# Altium PCB carrier board Ultrafiltrasi.PcbDoc (part 2 of 4)
Units mm, origin at the board's own origin, x right, y up, seen from the top; angles counter-clockwise.
Board outline 196.34 x 220.85 mm, 2 copper layers (Top Layer, Bottom Layer); 114 components, 209 nets, 667 pads, 70 vias.
Unrouted connection lines stored in the file: 5.
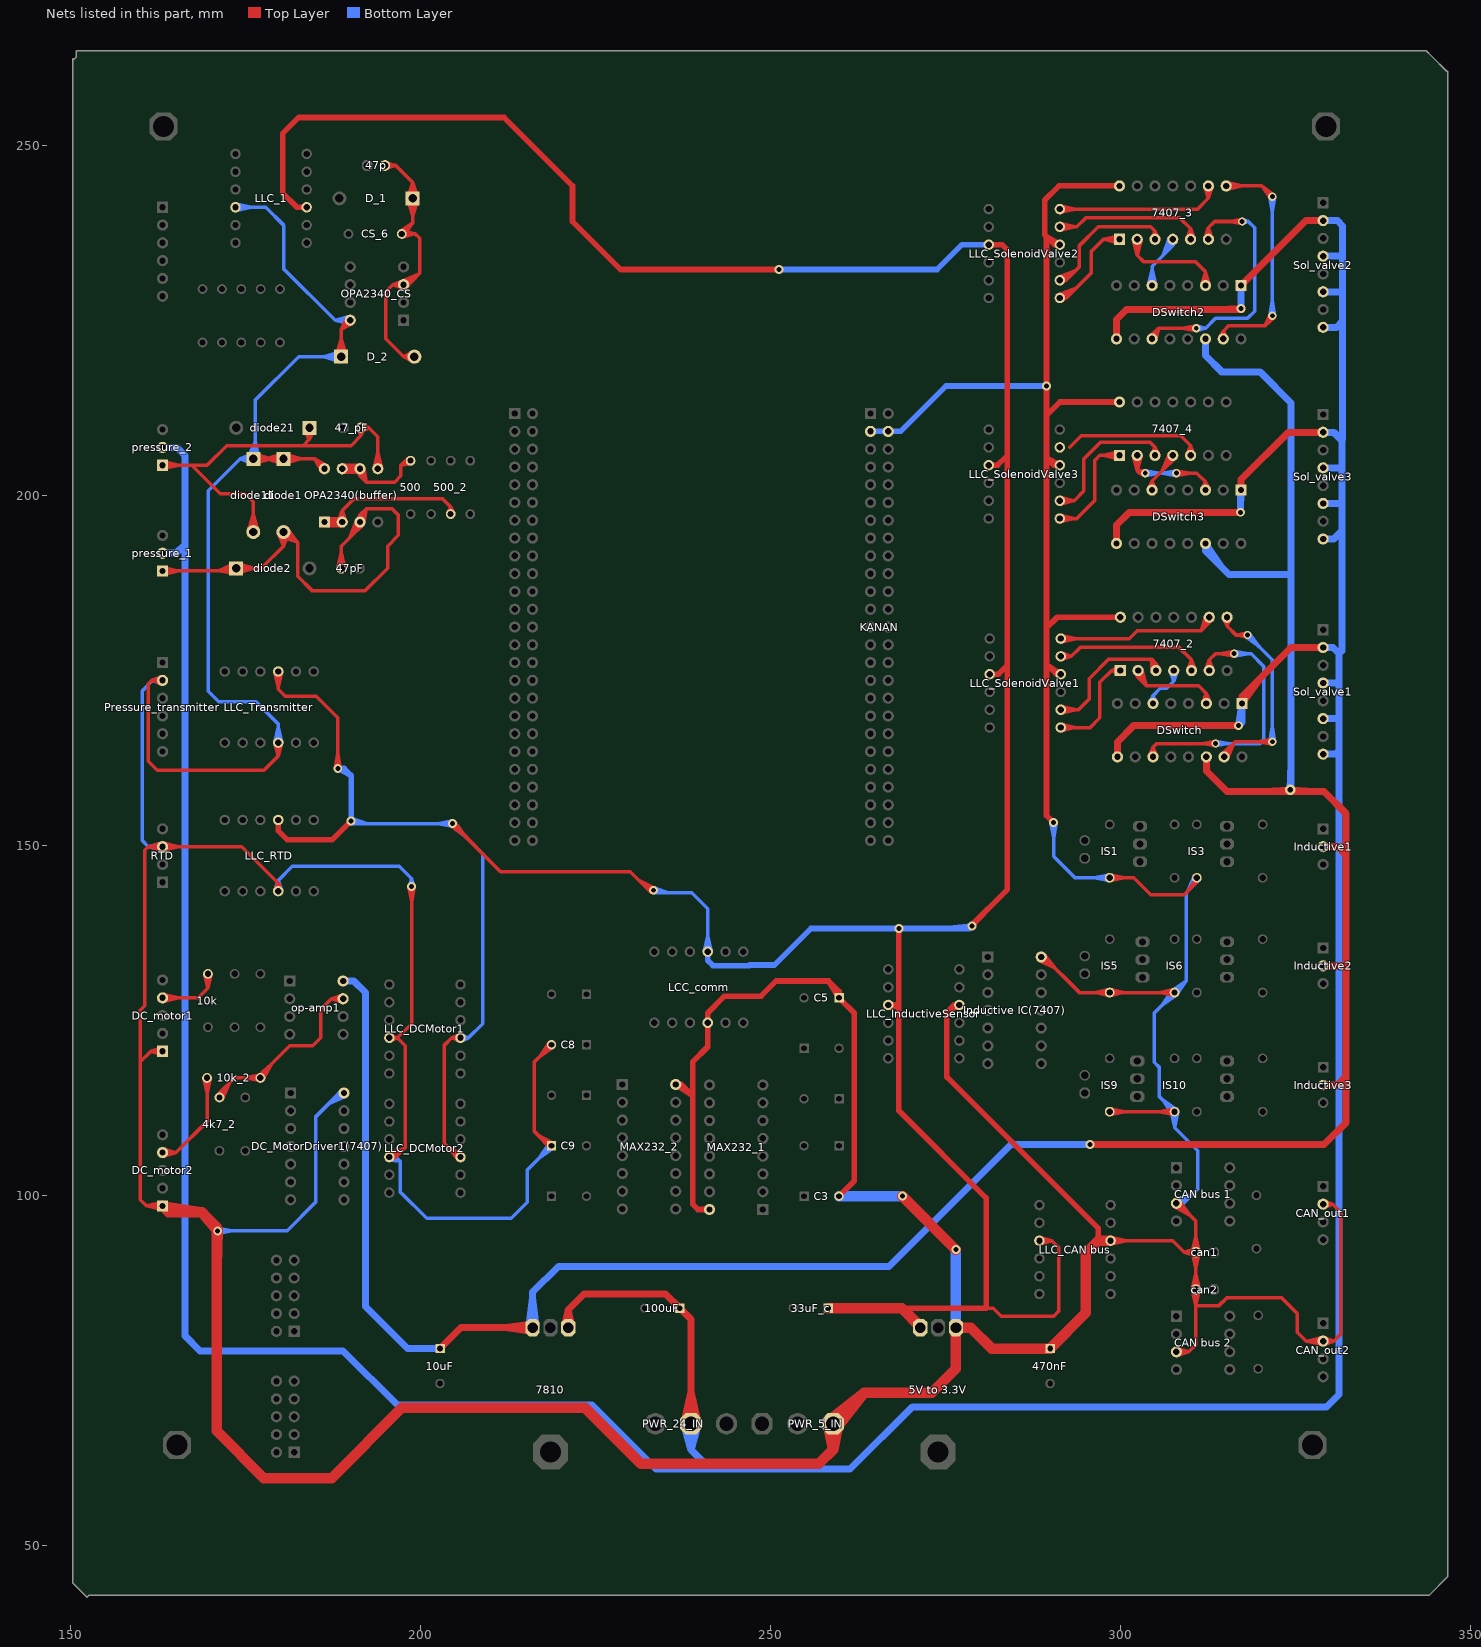
[diagram p2: the nets of this part, all layers, seen from the top]

## Via types
v1: diameter 1.2, hole 0.711, Top Layer to Bottom Layer, 26 vias
v2: diameter 1.27, hole 0.711, Top Layer to Bottom Layer, 24 vias
v3: diameter 1.2, hole 0.7, Top Layer to Bottom Layer, 19 vias
v4: diameter 1.5, hole 0.8, Top Layer to Bottom Layer, 1 vias

## Nets (pads, with @x,y where several pads share a name; then routed paths per layer and width w, separated by ;. In a path a pad name is that pad's centre, name@x,y a point inside that pad or via, vN(x,y) a via of type N, cw(c..) or ccw(c..) an arc to the next point about the centre after c; other vN are vias at no path point) (continued)
Net4k7_2_2: 4k7_2.2 10k_2.1 op-amp1.7 | length 50.9
  Top Layer w0.5: 4k7_2.2@170.978,114.335 172.769,116.127 ; 4k7_2.2@171.714,113.823 172.769,116.127 ; 10k_2.1@176.841,117.152 178.732,118.788 ; 10k_2.1@177.119,116.392 174.965,116.84 10k_2.1@177.119,117.288 ; 10k_2.1@177.54,116.591 178.732,118.788 ; op-amp1.7@188.884,127.601 187.325,128.143 ; op-amp1.7@188.884,128.685 187.325,128.143 ; 172.769,116.127 4k7_2.2@171.323,114.046 171.323,114.681 173.482,116.84 10k_2.1@177.165,116.84 ; 10k_2.1@177.165,116.84 178.732,118.788 ; 10k_2.1@177.165,116.84 177.165,117.221 181.356,121.412 184.658,121.412 185.801,122.555 185.801,126.619 187.325,128.143 ; 187.325,128.143 op-amp1.7@188.976,128.143 187.325,128.143
"Net5V to 3.3V_1": 470nF.1 7407_2.14 7407_3.14 7407_4.14 "5V to 3.3V.1" "CAN bus 1.3" "CAN bus 2.3" "Inductive IC(7407).14" "LLC_CAN bus.P$10" C3.2 C5.1 C8.2 C9.1 can1.2 can2.2 CAN_out1.2 CAN_out2.2 D_2.2 DC_motor1.1 DC_motor2.1 DC_MotorDriver1(7407).14 diode1.2 diode11.2 IS1.1 IS3.1 IS5.1 IS6.1 IS9.1 IS10.1 KANAN.3 KANAN.4 LCC_comm.P$10 LLC_1.P$10 LLC_DCMotor1.P$10 LLC_DCMotor2.P$10 LLC_InductiveSensor.P$10 LLC_RTD.P$10 LLC_SolenoidValve1.P$10 LLC_SolenoidValve2.P$10 LLC_SolenoidValve3.P$10 LLC_Transmitter.P$10 MAX232_1.16 MAX232_2.16 OPA2340(buffer).8 OPA2340_CS.8 Pressure_transmitter.2 PWR_5_IN.1 RTD.3 | length 1543.5
  Top Layer w0.5: Pressure_transmitter.2@163.096,173.068 161.671,173.609 ; Pressure_transmitter.2@163.096,174.15 161.671,173.609 ; DC_motor1.1@163.101,121.192 161.534,120.64 ; DC_motor1.1@163.107,120.107 161.534,120.64 ; RTD.3@163.121,149.315 161.163,149.86 ; RTD.3@163.121,150.405 161.163,149.86 ; DC_motor2.1@163.129,98.006 160.909,98.552 ; DC_motor2.1@163.129,99.098 160.909,98.552 ; DC_motor2.1@163.195,98.552 160.909,98.552 ; DC_motor1.1@163.195,120.64 161.534,120.64 ; DC_motor1.1@163.195,120.65 161.534,120.64 ; Pressure_transmitter.2@163.195,173.609 161.671,173.609 ; RTD.3@163.261,149.314 165.495,149.86 RTD.3@163.261,150.406 ; diode11.2@176.149,205.255 diode1.2@180.467,205.255 184.889,205.255 ; diode11.2@176.161,205.005 178.649,205.255 ; diode11.2@176.161,205.505 178.649,205.255 ; diode11.2@176.262,204.513 178.649,205.255 ; diode11.2@176.262,205.997 178.649,205.255 ; LLC_Transmitter.P$10@179.209,164.653 179.705,162.814 ; LLC_RTD.P$10@179.217,143.619 179.705,144.653 ; LLC_RTD.P$10@179.705,143.51 179.705,144.653 ; LLC_Transmitter.P$10@179.705,164.719 179.705,162.814 ; LLC_RTD.P$10@180.193,143.619 179.705,144.653 ; LLC_Transmitter.P$10@180.201,164.653 179.705,162.814 ; diode1.2@180.354,204.513 177.967,205.255 ; diode1.2@180.354,205.997 177.967,205.255 ; diode1.2@180.455,205.005 177.967,205.255 ; diode1.2@180.455,205.505 177.967,205.255 ; diode1.2@180.479,205.005 182.967,205.255 ; diode1.2@180.479,205.505 182.967,205.255 ; diode1.2@180.58,204.513 182.967,205.255 ; diode1.2@180.58,205.997 182.967,205.255 ; 185.87,203.503 184.889,205.255 ; 186.309,203.835 184.889,205.255 ; 186.641,204.274 184.889,205.255 ; D_2.2@187.957,219.95 188.699,222.337 ; D_2.2@188.449,219.849 188.699,222.337 ; D_2.2@188.699,219.837 188.699,223.751 ; D_2.2@188.949,219.849 188.699,222.337 ; D_2.2@189.441,219.95 188.699,222.337 ; OPA2340_CS.8@189.549,225.37 188.699,223.751 ; OPA2340_CS.8@189.992,225.044 188.699,223.751 ; OPA2340_CS.8@190.318,224.601 188.699,223.751 ; LLC_DCMotor2.P$10@195.369,105.99 197.759,106.827 ; LLC_DCMotor1.P$10@195.58,122.555 196.723,122.555 ; LLC_DCMotor1.P$10@195.689,122.067 196.723,122.555 ; LLC_DCMotor1.P$10@195.689,123.043 196.723,122.555 ; LLC_DCMotor2.P$10@195.876,105.134 197.759,106.827 ; v2@198.372,144.11 198.755,142.01 v2@199.138,144.11 ; v2(198.755,144.145) 198.755,124.587 196.723,122.555 ; C8.2@218.409,121.844 216.998,119.835 C8.2@219.007,121.245 ; C9.1@218.441,106.848 216.835,108.666 ; C8.2@218.734,121.571 216.309,119.146 216.309,109.192 218.345,107.156 C9.1@218.734,107.156 216.835,108.666 ; C9.1@218.968,107.511 216.835,108.666 ; 288.37,133.652 290.717,132.447 ; 289.061,134.5 290.717,132.447 ; IS5.1@298.404,128.584 296.25,129.032 IS5.1@298.404,129.48 ; IS9.1@298.45,112.014 IS10.1@307.721,112.014 ; IS1.1@298.45,145.415 301.879,145.415 304.292,143.002 309.118,143.002 310.896,144.78 IS3.1@310.896,145.415 309.468,143.352 IS3.1@311.242,145.127 ; IS9.1@298.496,111.566 300.65,112.014 IS9.1@298.496,112.462 ; IS5.1@298.496,128.584 300.65,129.032 IS5.1@298.496,129.48 ; IS1.1@298.496,144.967 300.65,145.415 IS1.1@298.496,145.863 ; 298.577,93.599 307.467,93.599 309.118,91.948 ; 298.633,93.102 300.827,93.599 298.633,94.096 ; 307.66,98.482 309.933,97.229 ; IS10.1@307.675,111.566 305.521,112.014 IS10.1@307.675,112.462 ; IS6.1@307.675,128.584 305.521,129.032 IS6.1@307.675,129.48 ; IS6.1@307.721,129.032 IS5.1@298.45,129.032 294.132,129.032 289.052,134.112 288.671,134.112 290.717,132.447 ; 307.975,77.724 309.753,77.724 ; 308.06,77.181 309.753,77.724 ; 308.06,78.267 309.753,77.724 ; 308.378,99.307 309.933,97.229 ; can2.2@310.26,86.556 310.769,84.352 can2.2@311.278,86.556 ; can2.2@310.26,86.672 310.769,88.876 can2.2@311.278,86.672 ; can1.2@310.26,91.89 310.769,89.686 can1.2@311.278,91.89 ; can1.2@310.26,92.006 310.769,94.21 can1.2@311.278,92.006 ; can1.2@310.69,91.442 309.118,91.948 ; can1.2@310.69,92.454 309.118,91.948 ; CAN_out2.2@328.864,78.702 326.63,79.248 CAN_out2.2@328.864,79.794 ; CAN_out1.2@328.93,98.806 330.327,98.806 ; CAN_out2.2@329.029,78.707 330.454,79.248 ; CAN_out2.2@329.029,79.789 330.454,79.248 ; CAN_out1.2@329.038,98.267 330.327,98.806 ; CAN_out1.2@329.038,99.345 330.327,98.806 ; 160.02,119.126 160.02,126.512 160.645,127.137 160.645,149.342 161.163,149.86 ; 160.02,119.126 160.02,99.441 160.909,98.552 ; 160.02,119.126 161.534,120.64 ; 161.163,149.86 RTD.3@163.195,149.86 174.498,149.86 179.705,144.653 ; 161.671,173.609 161.163,173.101 161.163,162.052 162.433,160.782 177.673,160.782 179.705,162.814 ; LLC_DCMotor2.P$10@195.58,105.537 196.469,105.537 ; LLC_DCMotor2.P$10@195.58,105.537 197.759,106.827 ; LLC_DCMotor2.P$10@195.58,105.537 196.469,105.537 ; 196.469,105.537 195.721,105.057 196.469,105.537 ; 196.469,105.537 195.721,106.017 196.469,105.537 ; 196.469,105.537 197.866,106.934 197.866,121.412 196.723,122.555 ; 309.118,91.948 can1.2@310.769,91.948 ; 309.753,77.724 310.769,78.74 310.769,84.328 ; 309.933,97.229 307.975,98.933 308.229,98.933 310.769,96.393 can1.2@310.769,91.948 ; 310.769,84.328 314.071,84.328 315.214,85.471 322.961,85.471 325.247,83.185 325.247,80.518 326.517,79.248 CAN_out2.2@328.93,79.248 330.454,79.248 ; 310.769,84.328 can2.2@310.769,86.614 can1.2@310.769,91.948 ; 330.327,98.806 331.47,97.663 331.47,80.264 330.454,79.248
  Top Layer w0.8: 241.046,121.564 LCC_comm.P$10@241.046,124.714 ; C3.2@259.802,99.949 262.001,102.148 262.001,126.071 C5.1@259.802,128.27 ; v2(290.449,153.289) 289.433,154.305 289.433,175.895 ; LLC_SolenoidValve1.P$10@290.83,174.498 289.433,175.895 ; LLC_SolenoidValve1.P$10@291.465,174.498 289.433,175.895 ; 296.799,93.599 296.799,95.377 275.209,116.967 275.209,126.238 ; 7407_4.14@299.847,213.36 291.338,213.36 289.433,211.455 ; 7407_3.14@299.847,244.221 291.211,244.221 289.179,242.189 289.179,237.236 289.433,236.982 ; 7407_2.14@299.974,182.626 290.957,182.626 289.433,181.102 ; MAX232_2.16@236.474,115.892 237.295,115.892 ; MAX232_2.16@236.474,115.892 238.887,114.3 ; MAX232_2.16@236.474,115.892 237.295,115.892 ; 237.295,115.892 238.887,114.3 ; 238.887,114.3 238.887,98.806 239.649,98.044 ; 238.887,114.3 238.887,119.126 241.046,121.285 LCC_comm.P$10@241.046,124.714 ; 239.649,98.044 MAX232_1.16@241.3,98.044 239.649,98.044 ; LCC_comm.P$10@241.046,124.714 241.046,126.111 243.459,128.524 248.666,128.524 250.825,130.683 258.318,130.683 ; 258.318,130.683 C5.1@259.802,128.27 ; 258.318,130.683 259.802,129.199 ; C5.1@259.802,128.27 259.802,129.199 ; C5.1@259.802,128.27 259.802,129.199 ; 275.209,126.238 LLC_InductiveSensor.P$10@276.987,127.254 ; 275.209,126.238 276.225,127.254 ; 276.225,127.254 LLC_InductiveSensor.P$10@276.987,127.254 ; 276.225,127.254 LLC_InductiveSensor.P$10@276.987,127.254 ; 289.433,175.895 289.433,181.102 ; 289.433,181.102 289.433,205.359 ; 289.433,205.359 LLC_SolenoidValve3.P$10@291.338,204.343 ; 289.433,205.359 290.449,204.343 ; 289.433,205.359 289.433,211.455 ; 289.433,211.455 289.433,236.982 ; 289.433,236.982 LLC_SolenoidValve2.P$10@291.338,235.839 ; 289.433,236.982 290.576,235.839 ; 290.449,204.343 LLC_SolenoidValve3.P$10@291.338,204.343 ; 290.449,204.343 LLC_SolenoidValve3.P$10@291.338,204.343 ; 290.576,235.839 LLC_SolenoidValve2.P$10@291.338,235.839 ; 290.576,235.839 LLC_SolenoidValve2.P$10@291.338,235.839
  Top Layer w1.5: 170.942,89.854 v2(171.069,94.996) 168.783,97.663 ; PWR_5_IN.1@258.196,67.368 258.966,63.767 ; PWR_5_IN.1@258.453,68.03 263.398,71.882 ; PWR_5_IN.1@259.546,66.937 263.398,71.882 ; PWR_5_IN.1@259.735,67.368 258.966,63.767 ; v2(268.859,99.949) v2(276.492,92.316) ; 276.492,75.396 276.492,80.912 ; 298.577,93.599 296.799,93.599 295.021,91.821 295.021,83.272 470nF.1@289.941,78.192 281.599,78.192 278.625,81.166 276.492,81.166 276.492,75.324 273.05,71.882 263.398,71.882 ; DC_motor2.1@163.195,98.552 164.084,97.663 ; DC_motor2.1@163.195,98.552 168.783,97.663 ; DC_motor2.1@163.195,98.552 164.084,97.663 ; 164.084,97.663 168.783,97.663 ; 168.783,97.663 170.942,95.504 170.942,66.421 177.673,59.69 187.325,59.69 197.358,69.723 223.52,69.723 231.521,61.722 256.921,61.722 258.966,63.767 ; 258.966,63.767 PWR_5_IN.1@258.966,67.45 263.398,71.882
  Bottom Layer w0.5: Pressure_transmitter.2@163.087,173.07 161.798,173.609 ; Pressure_transmitter.2@163.087,174.148 161.798,173.609 ; RTD.3@163.121,149.315 161.163,149.86 ; RTD.3@163.121,150.405 161.163,149.86 ; RTD.3@163.195,149.86 161.163,149.86 ; Pressure_transmitter.2@163.195,173.609 161.798,173.609 ; v2@170.688,94.996 180.975,94.996 185.039,99.06 185.039,111.259 188.171,114.391 ; v2(171.069,94.996) 173.204,94.996 ; v2@171.104,94.613 173.204,94.996 ; v2@171.104,95.379 173.204,94.996 ; LLC_1.P$10@173.609,241.173 177.927,241.173 180.467,238.633 180.467,232.41 187.833,225.044 ; LLC_1.P$10@173.665,240.676 175.859,241.173 LLC_1.P$10@173.665,241.67 ; diode11.2@175.426,205.454 176.463,207.809 ; diode11.2@175.903,205.298 176.463,207.809 ; diode11.2@176,204.52 174.267,205.255 ; diode11.2@176,205.99 174.267,205.255 ; diode11.2@176.132,205.006 174.267,205.255 ; diode11.2@176.132,205.504 174.267,205.255 ; diode11.2@176.398,205.237 176.463,207.809 ; diode11.2@176.899,205.273 176.463,207.809 ; LLC_Transmitter.P$10@179.208,164.775 179.705,166.969 LLC_Transmitter.P$10@180.202,164.775 ; LLC_RTD.P$10@179.212,143.592 179.705,145.034 ; LLC_RTD.P$10@179.705,143.51 179.705,145.034 ; LLC_Transmitter.P$10@179.705,164.719 179.705,167.386 176.53,170.561 171.196,170.561 169.725,172.032 169.725,200.713 174.267,205.255 ; LLC_RTD.P$10@180.198,143.592 179.705,145.034 ; D_2.2@188.586,219.095 186.199,219.837 ; D_2.2@188.586,220.579 186.199,219.837 ; D_2.2@188.686,219.587 186.199,219.837 ; D_2.2@188.686,220.087 186.199,219.837 ; D_2.2@188.699,219.837 182.626,219.837 176.463,213.674 176.463,205.569 diode11.2@176.149,205.255 ; 188.742,115.096 186.941,113.161 ; 189.371,114.201 186.941,113.161 ; OPA2340_CS.8@189.922,224.498 187.833,225.044 ; OPA2340_CS.8@189.922,225.59 187.833,225.044 ; OPA2340_CS.8@189.992,225.044 187.833,225.044 ; LLC_DCMotor2.P$10@195.46,105.052 197.104,104.902 ; LLC_DCMotor2.P$10@195.84,105.964 197.104,104.902 ; v2@198.375,144.21 198.755,145.288 ; v2(198.755,144.145) 198.755,145.288 ; v2@199.135,144.21 198.755,145.288 ; C9.1@218.409,107.43 216.998,105.421 C9.1@219.007,106.831 ; C9.1@218.734,107.156 215.265,103.687 215.265,99.06 212.979,96.774 200.914,96.774 197.104,100.584 197.104,104.902 ; v2@290.066,153.254 290.449,151.154 v2@290.832,153.254 ; v2(290.449,153.289) 290.449,148.463 293.497,145.415 IS1.1@298.45,145.415 ; IS1.1@298.404,144.967 296.25,145.415 IS1.1@298.404,145.863 ; IS10.1@307.273,111.968 307.721,109.814 IS10.1@308.169,111.968 ; IS10.1@307.375,111.726 305.96,113.775 IS10.1@308.009,112.36 ; IS6.1@307.375,129.32 305.96,127.271 IS6.1@308.009,128.686 ; IS6.1@307.435,129.379 309.372,130.683 ; 307.755,99.437 310.308,100.25 ; IS6.1@308.068,128.746 309.372,130.683 ; 308.293,98.484 310.308,100.25 ; IS3.1@310.504,145.636 309.483,143.367 ; IS3.1@311.242,145.127 309.483,143.367 ; 161.163,149.86 160.274,150.749 160.274,172.085 161.798,173.609 ; 174.267,205.255 diode11.2@176.149,205.255 ; diode11.2@176.149,205.255 176.463,207.809 ; 179.705,145.034 181.737,147.066 196.977,147.066 198.755,145.288 ; 186.941,113.161 189.103,114.681 ; 188.171,114.391 189.103,114.681 ; 188.171,114.391 188.798,115.139 188.171,114.391 ; 188.171,114.391 189.112,114.131 188.171,114.391 ; 188.171,114.391 189.103,114.681 ; 188.171,114.391 188.813,114.391 189.103,114.681 ; LLC_DCMotor2.P$10@195.58,105.537 196.469,105.537 ; LLC_DCMotor2.P$10@195.58,105.537 197.104,104.902 ; LLC_DCMotor2.P$10@195.58,105.537 196.469,105.537 ; 196.469,105.537 195.721,105.057 196.469,105.537 ; 196.469,105.537 195.721,106.017 196.469,105.537 ; 196.469,105.537 197.104,104.902 ; 307.975,98.933 308.991,98.933 ; 307.975,98.933 310.308,100.25 ; 307.975,98.933 308.991,98.933 ; 308.991,98.933 308.124,98.404 308.991,98.933 ; 308.991,98.933 308.124,99.462 308.991,98.933 ; 308.991,98.933 311.023,100.965 311.023,106.426 307.721,109.728 IS10.1@307.721,112.014 305.562,114.173 305.562,118.328 304.8,119.09 304.8,126.111 IS6.1@307.721,129.032 309.372,130.683 ; 309.372,130.683 309.372,143.256 310.896,144.78 IS3.1@310.896,145.415 309.483,143.367
  Bottom Layer w0.8: KANAN.3@264.287,209.169 KANAN.4@266.827,209.169 268.605,209.169 275.082,215.646 v2(289.433,215.646)
  Bottom Layer w1.5: C3.2@259.802,99.949 v2(268.859,99.949) 263.724,99.949 ; 276.492,81.166 v2(276.492,92.316) 276.492,87.181 ; 276.492,81.42 276.492,86.936
"Net5V to 3.3V_3": 33uF_c.1 "5V to 3.3V.3" "LLC_CAN bus.P$3" LCC_comm.P$3 LLC_1.P$3 LLC_DCMotor1.P$3 LLC_DCMotor2.P$3 LLC_InductiveSensor.P$3 LLC_RTD.P$3 LLC_SolenoidValve1.P$3 LLC_SolenoidValve2.P$3 LLC_SolenoidValve3.P$3 LLC_Transmitter.P$3 | length 630.4
  Top Layer w0.5: LLC_Transmitter.P$3@179.208,174.823 179.705,172.629 LLC_Transmitter.P$3@180.202,174.823 ; LLC_Transmitter.P$3@179.705,174.879 179.705,172.339 180.697,171.347 185.142,171.347 188.214,168.275 v2(188.214,161.036) ; v2@187.831,161.071 188.214,163.171 v2@188.597,161.071 ; v2@204.347,152.869 206.293,151.466 v2@204.89,153.412 ; v2(204.597,153.162) 211.455,146.304 229.997,146.304 v2@232.981,143.32 ; LLC_DCMotor2.P$3@205.389,105.181 203.785,107.111 ; LLC_DCMotor1.P$3@205.642,122.065 204.47,122.555 ; LLC_DCMotor1.P$3@205.642,123.045 204.47,122.555 ; LLC_DCMotor1.P$3@205.74,122.555 204.47,122.555 ; LLC_DCMotor2.P$3@206.013,105.956 203.785,107.111 ; v2@233.057,143.337 231.292,145.009 ; v2(233.299,143.637) 231.292,145.009 ; v2@233.49,143.971 231.292,145.009 ; 280.797,83.947 281.813,83.947 282.956,82.804 290.449,82.804 291.211,83.566 291.211,92.583 290.195,93.599 ; 288.417,93.599 290.195,93.599 ; 288.487,93.104 290.195,93.599 ; 288.487,94.094 290.195,93.599 ; 203.785,107.111 LLC_DCMotor2.P$3@205.74,105.537 205.359,105.537 203.454,107.442 203.454,121.539 204.47,122.555
  Top Layer w0.8: LLC_RTD.P$3@179.705,153.67 179.705,152.146 180.975,150.876 187.452,150.876 v2(190.119,153.543) ; LLC_1.P$3@183.769,241.173 182.372,241.173 180.34,243.205 180.34,251.714 182.626,254 211.963,254 221.742,244.221 221.742,239.141 228.6,232.283 v2(251.206,232.283) 248.171,232.283 ; v2(268.351,138.176) 268.351,126.873 ; 268.732,83.947 280.797,83.947 280.797,99.695 268.351,112.141 268.351,126.873 ; v2@278.511,138.43 283.845,143.764 283.845,175.768 ; v2(278.765,138.557) 281.028,140.947 ; LLC_SolenoidValve3.P$3@281.178,204.343 282.448,204.343 283.845,205.74 ; LLC_SolenoidValve2.P$3@281.178,235.839 283.083,235.839 283.845,235.077 283.845,205.74 ; LLC_SolenoidValve1.P$3@281.305,174.498 282.575,174.498 283.845,175.768 ; LLC_InductiveSensor.P$3@266.827,127.254 267.97,127.254 ; LLC_InductiveSensor.P$3@266.827,127.254 268.351,126.873 ; LLC_InductiveSensor.P$3@266.827,127.254 267.97,127.254 ; 267.97,127.254 268.351,126.873 ; 283.845,175.768 283.845,205.74
  Top Layer w1.5: 33uF_c.1@258.278,83.947 268.732,83.947 ; 271.412,81.166 271.412,81.267 268.732,83.947 ; 271.412,81.42 268.732,83.947
  Bottom Layer w0.5: v2@190.088,153.159 192.444,153.162 ; v2@190.212,153.917 192.444,153.162 ; v2@204.347,152.869 206.293,151.466 v2@204.89,153.412 ; v2@204.562,152.779 202.462,153.162 v2@204.562,153.545 ; LLC_DCMotor1.P$3@205.74,122.555 206.883,122.555 ; LLC_DCMotor1.P$3@205.849,122.067 206.883,122.555 ; LLC_DCMotor1.P$3@205.849,123.043 206.883,122.555 ; v2@233.267,143.253 235.518,143.256 ; v2@233.299,143.256 238.76,143.256 241.046,140.97 LCC_comm.P$3@241.046,134.874 ; v2(233.299,143.637) 235.518,143.256 ; v2@233.396,144.009 235.518,143.256 ; LCC_comm.P$3@240.549,134.93 241.046,137.124 LCC_comm.P$3@241.543,134.93 ; 192.444,153.162 v2(190.119,153.543) 190.5,153.162 v2(204.597,153.162) 208.915,148.844 208.915,124.587 206.883,122.555
  Bottom Layer w0.8: v2(190.119,153.543) 190.119,160.02 ; LCC_comm.P$3@241.046,134.874 241.046,133.604 241.786,132.864 246.958,132.864 247.063,132.969 250.571,132.969 255.778,138.176 v2(268.351,138.176) 278.384,138.176 v2(278.765,138.557) 275.545,138.176 ; v2(251.206,232.283) 273.812,232.283 277.368,235.839 LLC_SolenoidValve2.P$3@281.178,235.839 ; v2(188.214,161.036) 189.103,161.036 ; v2(188.214,161.036) 190.119,160.02 ; v2(188.214,161.036) 189.103,161.036 ; 189.103,161.036 190.119,160.02
Net10k_2: 10k.2 DC_motor1.4 | length 19.8
  Top Layer w0.5: DC_motor1.4@163.195,128.27 168.275,128.27 169.672,129.667 ; DC_motor1.4@163.261,127.724 165.495,128.27 DC_motor1.4@163.261,128.816 ; 10k.2@169.225,131.649 169.672,129.667 ; 10k.2@170.119,131.649 169.672,129.667 ; 169.672,129.667 10k.2@169.672,131.699 169.672,129.667
Net10k_2_2: 10k_2.2 DC_motor2.4 | length 22.6
  Top Layer w0.5: DC_motor2.4@163.195,106.172 165.1,106.172 ; DC_motor2.4@163.274,105.628 165.1,106.172 ; DC_motor2.4@163.274,106.716 165.1,106.172 ; 10k_2.2@169.097,116.794 169.545,114.64 10k_2.2@169.993,116.794 ; 10k_2.2@169.545,116.84 169.545,110.617 165.1,106.172
Net10uF_1: 10uF.1 7810.3 DSwitch2.14 DSwitch3.14 DSwitch.14 Inductive1.2 Inductive2.2 Inductive3.2 op-amp1.8 | length 413.6
  Top Layer w1: 10uF.1@202.819,78.192 205.793,81.166 7810.3@216.04,81.166 ; 7810.3@216.007,80.651 212.024,81.166 7810.3@216.007,81.681 ; v2(295.656,107.315) 329.057,107.315 332.232,110.49 332.232,117.094 ; DSwitch.14@312.254,162.687 312.254,160.694 315.214,157.734 329.057,157.734 332.232,154.559 332.232,148.59 ; 320.446,157.734 v4(324.231,157.988) 328.011,157.734 ; Inductive3.2@328.93,115.824 330.962,115.824 332.232,117.094 ; Inductive2.2@328.93,132.842 332.105,132.842 ; Inductive1.2@328.93,149.86 330.962,149.86 332.232,148.59 ; 332.232,117.094 332.232,148.59
  Bottom Layer w1: op-amp1.8@188.976,130.683 190.5,130.683 192.151,129.032 192.151,84.201 198.16,78.192 10uF.1@202.819,78.192 ; 7810.3@215.525,81.453 216.04,85.436 ; 7810.3@216.04,81.166 216.04,86.246 219.71,89.916 266.954,89.916 284.353,107.315 v2(295.656,107.315) ; 7810.3@216.04,81.42 216.04,85.436 ; 7810.3@216.555,81.453 216.04,85.436 ; 314.53,189.66 DSwitch3.14@312.127,193.167 ; v4(324.231,157.988) 324.358,161.75 ; v4@324.231,158.242 324.358,158.115 324.358,188.722 ; 312.127,192.063 DSwitch3.14@312.127,193.167 ; 312.127,192.063 315.468,188.722 324.358,188.722 ; 312.127,192.063 DSwitch3.14@312.127,193.167 ; 312.127,220.003 DSwitch2.14@312.127,222.377 312.127,220.003 ; 312.127,220.003 314.452,217.678 319.913,217.678 324.358,213.233 324.358,188.722
Net47_pF_2: 47_pF.2 diode11.1 diode21.2 OPA2340(buffer).5 pressure_2.1 | length 98.8
  Top Layer w0.5: pressure_2.1@163.195,204.343 167.386,204.343 ; pressure_2.1@163.261,203.797 165.495,204.343 pressure_2.1@163.261,204.889 ; diode11.1@175.407,194.907 176.149,197.295 ; diode11.1@175.899,194.807 176.149,197.295 ; diode11.1@176.149,194.795 176.149,199.136 175.006,200.279 171.45,200.279 167.386,204.343 ; diode11.1@176.399,194.807 176.149,197.295 ; diode11.1@176.891,194.907 176.149,197.295 ; 47_pF.2@191.017,209.562 191.516,208.534 ; 47_pF.2@191.631,209.178 192.659,209.677 ; 47_pF.2@191.631,210.176 192.659,209.677 ; 47_pF.2@192.015,209.562 191.516,208.534 ; 193.383,203.901 193.929,206.135 194.475,203.901 ; 193.929,203.835 193.929,208.407 192.659,209.677 ; 167.386,204.343 169.545,204.343 172.339,207.137 183.261,207.137 ; 183.261,207.137 190.119,207.137 191.516,208.534 ; 183.261,207.137 184.15,208.026 ; 184.15,208.026 diode21.2@184.173,209.677 184.15,208.026 ; 184.15,208.026 183.923,209.662 184.15,208.026 ; 184.15,208.026 184.422,209.655 184.15,208.026 ; 184.15,208.026 183.44,209.517 184.15,208.026 ; 184.15,208.026 184.901,209.497 184.15,208.026 ; 184.15,208.026 184.15,209.677 184.15,208.026 ; 191.516,208.534 47_pF.2@191.516,209.677 192.659,209.677
Net47p_2: 47p.2 CS_6.2 D_1.2 D_2.1 OPA2340_CS.3 | length 85.8
  Top Layer w0.5: 47p.2@194.945,247.142 196.469,247.142 ; 47p.2@195.031,246.637 196.469,247.142 ; 47p.2@195.031,247.647 196.469,247.142 ; CS_6.2@197.074,237.712 198.905,238.91 ; OPA2340_CS.3@197.346,230.605 199.733,231.61 ; CS_6.2@197.411,236.916 199.263,237.363 ; CS_6.2@197.411,237.81 199.263,237.363 ; OPA2340_CS.3@197.513,229.583 196.088,230.124 ; OPA2340_CS.3@197.513,230.665 196.088,230.124 ; CS_6.2@197.707,237.079 198.905,238.91 ; OPA2340_CS.3@197.974,229.71 199.733,231.61 ; D_1.2@198.163,242.33 198.905,239.943 ; D_1.2@198.165,242.567 198.905,244.706 ; D_1.2@198.655,242.431 198.905,239.943 ; D_1.2@198.655,242.457 198.905,244.706 ; D_2.1@198.977,219.109 197.612,219.837 ; D_2.1@198.977,220.565 197.612,219.837 ; D_2.1@199.139,219.588 197.612,219.837 ; D_2.1@199.139,220.086 197.612,219.837 ; D_1.2@199.155,242.431 198.905,239.943 ; D_1.2@199.155,242.457 198.905,244.706 ; D_2.1@199.159,219.837 197.612,219.837 ; D_1.2@199.645,242.567 198.905,244.706 ; D_1.2@199.647,242.33 198.905,239.943 ; 196.088,230.124 OPA2340_CS.3@197.612,230.124 ; 196.088,230.124 195.072,229.108 195.072,222.377 197.612,219.837 ; 196.469,247.142 198.905,244.706 ; OPA2340_CS.3@197.612,230.124 199.733,231.61 ; OPA2340_CS.3@197.612,230.124 198.247,230.124 199.898,231.775 199.898,236.728 199.263,237.363 ; 198.905,238.91 D_1.2@198.905,242.443 198.905,244.706 ; 198.905,238.91 CS_6.2@197.358,237.363 199.263,237.363
Net47pF_2: 47pF.2 diode1.1 diode2.2 OPA2340(buffer).3 pressure_1.1 | length 138.8
  Top Layer w0.5: pressure_1.1@163.195,189.23 173.332,189.23 diode2.2@173.713,189.611 ; pressure_1.1@163.261,188.684 165.495,189.23 pressure_1.1@163.261,189.776 ; diode2.2@173.499,190.33 171.123,189.23 ; diode2.2@173.665,189.856 171.123,189.23 ; diode2.2@173.715,188.861 171.123,189.23 ; diode2.2@173.725,189.361 176.213,189.611 ; diode2.2@173.725,189.861 176.213,189.611 ; diode2.2@173.738,189.362 171.123,189.23 ; diode2.2@173.825,188.869 176.213,189.611 ; diode2.2@173.825,190.353 176.213,189.611 ; diode1.1@179.73,194.655 180.467,192.786 ; diode1.1@180.116,194.132 182.499,193.294 ; diode1.1@180.217,194.779 180.467,192.786 ; diode1.1@180.329,194.587 182.499,193.294 ; diode1.1@180.625,194.988 182.499,193.294 ; diode1.1@180.717,194.779 180.467,192.786 ; diode1.1@180.997,195.325 182.499,193.294 ; diode1.1@181.204,194.655 180.467,192.786 ; 47pF.2@188.213,189.669 188.722,191.873 47pF.2@189.231,189.669 ; 47pF.2@188.722,189.611 188.722,192.786 191.389,195.453 191.389,196.215 ; 190.902,196.471 189.888,193.952 ; 190.925,196.511 192.278,198.12 ; 191.814,195.866 189.888,193.952 ; 191.914,196.05 192.278,198.12 ; 171.123,189.23 diode2.2@173.713,189.611 ; diode2.2@173.713,189.611 177.292,189.611 180.467,192.786 ; 180.467,192.786 diode1.1@180.467,194.795 ; diode1.1@180.467,194.795 182.499,193.294 ; diode1.1@180.467,194.795 180.998,194.795 182.499,193.294 ; 182.499,193.294 182.499,188.468 184.531,186.436 192.151,186.436 195.326,189.611 195.326,192.786 196.85,194.31 196.85,197.231 195.961,198.12 192.278,198.12 ; 189.888,193.952 191.389,196.215 ; 191.389,196.215 191.389,197.231 ; 191.389,196.215 192.278,198.12 ; 191.389,196.215 191.389,197.231 ; 191.389,197.231 191.918,196.364 191.389,197.231 ; 191.389,197.231 190.86,196.364 191.389,197.231 ; 191.389,197.231 192.278,198.12
Net100uF_1: 100uF.1 7810.1 DSwitch2.1 DSwitch2.9 DSwitch3.1 DSwitch3.9 DSwitch.1 DSwitch.9 pressure_1.2 pressure_2.2 PWR_24_IN.1 Sol_valve1.2 Sol_valve1.4 Sol_valve1.6 Sol_valve1.8 Sol_valve2.2 Sol_valve2.4 Sol_valve2.6 Sol_valve2.8 Sol_valve3.2 Sol_valve3.4 Sol_valve3.6 Sol_valve3.8 | length 718.7
  Top Layer w1: 7810.1@220.607,81.478 221.12,83.706 ; 7810.1@221.12,81.166 221.12,83.706 ; 7810.1@221.12,81.42 221.12,83.706 ; 7810.1@221.632,81.478 221.12,83.706 ; PWR_24_IN.1@237.628,67.566 238.646,71.974 PWR_24_IN.1@239.663,67.566 ; PWR_24_IN.1@238.646,67.45 238.646,82.37 100uF.1@237.069,83.947 235.037,85.979 223.393,85.979 221.12,83.706 ; DSwitch3.9@299.427,193.167 299.427,195.795 301.244,197.612 v2(317.119,197.612) ; DSwitch2.9@299.427,222.377 299.427,225.132 300.863,226.568 v2@317.373,226.568 ; DSwitch.9@299.554,162.687 299.554,164.807 301.879,167.132 v2(316.865,167.132) ; 313.556,226.568 v2(317.207,226.734) ; DSwitch3.1@317.207,200.787 317.207,202.272 323.977,209.042 Sol_valve3.2@328.93,209.042 Sol_valve3.2@329.184,209.042 ; DSwitch2.1@317.207,229.997 326.478,239.268 ; 319.837,173.787 DSwitch.1@317.334,170.307 ; Sol_valve2.2@328.803,239.268 326.478,239.268 ; Sol_valve1.2@328.93,178.308 324.358,178.308 317.334,171.284 ; Sol_valve2.2@328.93,239.268 326.478,239.268 ; DSwitch.1@317.334,170.307 317.334,171.284 ; DSwitch.1@317.334,170.307 317.334,171.284
  Bottom Layer w1: pressure_1.2@163.195,191.77 165.1,191.77 166.37,193.04 ; pressure_2.2@163.195,206.883 165.227,206.883 166.37,205.74 166.37,193.04 ; PWR_24_IN.1@237.632,67.308 238.646,63.741 ; PWR_24_IN.1@238.646,67.45 238.646,63.741 ; PWR_24_IN.1@239.66,67.308 238.646,63.741 ; Sol_valve1.8@328.93,163.068 330.708,163.068 331.216,163.576 ; Sol_valve1.6@328.93,168.148 331.089,168.148 ; Sol_valve1.4@328.93,173.228 331.216,173.228 ; Sol_valve1.2@328.93,178.308 330.327,178.308 331.216,177.419 331.216,173.228 ; Sol_valve3.8@328.93,193.802 330.454,193.802 331.597,194.945 ; Sol_valve3.6@328.93,198.882 331.597,198.882 ; Sol_valve3.4@328.93,203.962 331.597,203.962 ; Sol_valve3.2@328.93,209.042 330.454,209.042 331.597,207.899 331.597,203.962 ; Sol_valve2.8@328.93,224.028 330.835,224.028 331.724,224.917 ; Sol_valve2.6@328.93,229.108 331.724,229.108 ; Sol_valve2.4@328.93,234.188 331.597,234.188 ; Sol_valve2.2@328.93,239.268 330.962,239.268 331.724,238.506 331.724,229.108 ; 331.597,177.8 331.597,194.945 ; 331.724,208.026 331.724,224.917 ; 166.37,193.04 166.37,80.01 168.529,77.851 188.976,77.851 196.723,70.104 224.536,70.104 233.68,60.96 241.427,60.96 ; 238.646,63.741 241.427,60.96 ; 241.427,60.96 261.366,60.96 270.256,69.85 329.438,69.85 331.216,71.628 331.216,163.576 ; 331.216,163.576 331.216,173.228 ; 331.597,194.945 331.597,198.882 ; 331.597,198.882 331.597,203.962 ; 331.724,224.917 331.724,229.108 ; v2(316.865,167.132) DSwitch.1@317.334,170.307 317.334,167.601 v2(316.865,167.132) ; v2(317.119,197.612) DSwitch3.1@317.207,200.787 317.119,200.699 v2(317.119,197.612) ; v2(317.207,226.734) DSwitch2.1@317.207,229.997 v2(317.207,226.734)
Net500_2: 500.2 OPA2340(buffer).6 OPA2340(buffer).7 | length 57.4
  Top Layer w0.5: 188.796,203.288 191.116,203.339 ; 188.796,204.382 191.116,204.331 ; 188.915,203.289 191.149,203.835 188.915,204.381 ; 189.029,203.315 191.116,204.331 ; 189.029,204.355 191.116,203.339 ; 190.925,203.539 192.278,201.93 ; 191.323,203.289 189.089,203.835 191.323,204.381 ; 191.914,204 192.278,201.93 ; 500.2@198.384,205.356 197.231,204.343 ; 500.2@198.752,204.545 197.231,204.343 ; 500.2@199.009,204.978 197.866,204.978 ; 188.849,203.835 191.116,203.339 ; 188.849,203.835 191.116,204.331 ; 188.849,203.835 191.389,203.835 ; 191.389,202.819 190.86,203.686 191.389,202.819 ; 191.389,202.819 191.918,203.686 191.389,202.819 ; 191.389,202.819 191.389,203.835 ; 191.389,202.819 192.278,201.93 ; 191.389,202.819 191.389,203.835 ; 191.389,203.835 192.278,201.93 ; 192.278,201.93 196.342,201.93 197.231,202.819 197.231,204.343 ; 197.231,204.343 500.2@198.628,204.978 ; 197.231,204.343 197.866,204.978 ; 197.866,204.978 500.2@198.628,204.978 ; 197.866,204.978 198.495,205.408 197.866,204.978 ; 197.866,204.978 198.495,204.548 197.866,204.978 ; 197.866,204.978 500.2@198.628,204.978
Net500_2_2: 500_2.2 OPA2340(buffer).1 OPA2340(buffer).2 | length 59.5
  Top Layer w0.5: 186.256,195.668 188.576,195.719 ; 186.256,196.762 188.576,196.711 ; 186.489,195.695 188.576,196.711 ; 186.489,196.735 188.576,195.719 ; 188.307,196.307 188.849,197.866 ; 188.783,195.669 186.549,196.215 ; 188.783,196.761 186.549,196.215 ; 189.391,196.307 188.849,197.866 ; 500_2.2@203.904,197.458 204.343,198.374 ; 500_2.2@204.343,197.358 204.343,198.374 ; 500_2.2@204.782,197.458 204.343,198.374 ; 186.309,196.215 188.609,196.215 ; 186.309,196.215 188.576,196.711 ; 186.309,196.215 188.576,195.719 ; 186.309,196.215 188.849,196.215 ; 186.549,196.215 188.849,196.215 ; 188.609,196.215 186.375,195.669 188.609,196.215 ; 188.609,196.215 186.375,196.761 188.609,196.215 ; 188.849,196.215 188.849,197.866 ; 188.849,197.866 190.5,199.517 203.2,199.517 204.343,198.374
Net7407_2_1: 7407_2.1 LLC_SolenoidValve1.P$7 | length 23.2
  Top Layer w0.5: LLC_SolenoidValve1.P$7@291.465,166.878 295.656,166.878 297.053,168.275 297.053,173.355 298.704,175.006 ; LLC_SolenoidValve1.P$7@291.521,166.381 293.715,166.878 LLC_SolenoidValve1.P$7@291.521,167.375 ; 7407_2.1@299.855,174.469 298.704,175.006 ; 7407_2.1@299.855,175.543 298.704,175.006 ; 298.704,175.006 7407_2.1@299.974,175.006 298.704,175.006
Net7407_2_2: 7407_2.2 DSwitch.3 | length 28.4
  Top Layer w0.5: 7407_2.2@302.06,174.696 303.657,172.847 ; 7407_2.2@303.026,175.207 303.657,172.847 ; DSwitch.3@311.714,170.412 312.254,171.743 ; DSwitch.3@312.254,170.307 312.254,171.743 ; DSwitch.3@312.794,170.412 312.254,171.743 ; 302.514,173.99 7407_2.2@302.514,175.006 ; 302.514,173.99 301.985,174.857 302.514,173.99 ; 302.514,173.99 303.043,174.857 302.514,173.99 ; 302.514,173.99 303.657,172.847 ; 302.514,173.99 7407_2.2@302.514,175.006 ; 7407_2.2@302.514,175.006 303.657,172.847 ; 303.657,172.847 311.15,172.847 312.254,171.743
Net7407_2_3: 7407_2.3 LLC_SolenoidValve1.P$8 | length 34.5
  Top Layer w0.5: LLC_SolenoidValve1.P$8@291.465,169.418 294.005,169.418 295.529,170.942 295.529,173.863 298.323,176.657 304.419,176.657 ; LLC_SolenoidValve1.P$8@291.521,168.921 293.715,169.418 LLC_SolenoidValve1.P$8@291.521,169.915 ; 7407_2.3@304.516,174.891 304.419,176.657 ; 7407_2.3@305.53,175.281 304.419,176.657 ; 304.419,176.657 7407_2.3@305.054,175.006 ; 304.419,176.657 305.054,176.022 ; 7407_2.3@305.054,175.006 305.054,176.022 ; 7407_2.3@305.054,175.006 305.054,176.022 ; 305.054,176.022 305.583,175.155 305.054,176.022 ; 305.054,176.022 304.525,175.155 305.054,176.022
Net7407_2_4: 7407_2.4 DSwitch.6 | length 11.7
  Bottom Layer w0.5: DSwitch.6@304.101,170.444 304.634,171.411 ; DSwitch.6@304.634,170.307 304.634,171.411 ; DSwitch.6@305.167,170.444 304.634,171.411 ; 7407_2.4@307.053,174.907 307.594,173.482 ; 7407_2.4@307.594,175.006 307.594,173.482 ; 7407_2.4@308.135,174.907 307.594,173.482 ; 304.634,171.411 305.689,172.466 306.578,172.466 307.594,173.482
Net7407_2_5: 7407_2.5 LLC_SolenoidValve1.P$11 | length 27.6
  Top Layer w0.5: LLC_SolenoidValve1.P$11@291.465,177.038 292.989,177.038 ; LLC_SolenoidValve1.P$11@291.547,176.545 292.989,177.038 ; LLC_SolenoidValve1.P$11@291.547,177.531 292.989,177.038 ; 7407_2.5@309.593,175.105 310.134,176.53 ; 7407_2.5@310.134,175.006 310.134,176.53 ; 7407_2.5@310.675,175.105 310.134,176.53 ; 292.989,177.038 294.259,178.308 308.356,178.308 310.134,176.53
Net7407_2_6: 7407_2.6 DSwitch.11 | length 63.2
  Top Layer w0.5: DSwitch.11@304.095,162.798 304.634,164.045 ; DSwitch.11@304.634,162.687 304.634,164.045 ; DSwitch.11@305.173,162.798 304.634,164.045 ; 7407_2.6@312.133,175.105 312.674,176.53 ; 7407_2.6@312.674,175.006 312.674,176.53 ; 7407_2.6@313.215,175.105 312.674,176.53 ; v3@313.534,164.243 311.463,164.592 v3@313.534,164.941 ; v3(313.563,164.592) 305.181,164.592 304.634,164.045 ; v3@316.201,177.07 314.13,177.419 ; v3@316.201,177.768 314.13,177.419 ; 312.674,176.53 313.563,177.419 v3(316.23,177.419) 314.13,177.419
  Bottom Layer w0.5: v3(313.563,164.592) 319.913,164.592 320.421,165.1 320.421,175.641 318.643,177.419 v3(316.23,177.419) ; v3@313.592,164.243 315.663,164.592 v3@313.592,164.941 ; v3@316.259,177.07 318.33,177.419 v3@316.259,177.768
Net7407_2_8: 7407_2.8 DSwitch.15 | length 59.1
  Top Layer w0.5: DSwitch.15@314.383,163.053 316.289,164.778 ; 7407_2.8@314.677,182.507 315.214,181.356 ; DSwitch.15@315.273,162.417 316.289,164.778 ; 7407_2.8@315.751,182.507 315.214,181.356 ; v3@318.098,179.738 316.484,180.086 ; v3@318.098,180.434 316.484,180.086 ; v3@321.662,164.497 319.591,164.846 v3@321.662,165.195 ; v3(321.691,164.846) 316.357,164.846 314.794,163.283 DSwitch.15@314.794,162.687 316.289,164.778 ; 315.214,181.356 7407_2.8@315.214,182.626 315.214,181.356 ; 315.214,181.356 316.484,180.086 ; 316.484,180.086 v3(318.135,180.086) 316.484,180.086
  Bottom Layer w0.5: v3@317.907,179.821 319.796,178.425 v3@318.4,180.314 ; v3(318.135,180.086) 321.691,176.53 v3(321.691,164.846) ; v3@321.342,164.875 321.691,166.946 v3@322.04,164.875
Net7407_2_9: 7407_2.9 LLC_SolenoidValve1.P$12 | length 34.1
  Top Layer w0.5: LLC_SolenoidValve1.P$12@291.465,179.578 301.244,179.578 302.387,180.721 311.531,180.721 ; LLC_SolenoidValve1.P$12@291.521,179.081 293.715,179.578 LLC_SolenoidValve1.P$12@291.521,180.075 ; 7407_2.9@312.171,182.848 311.531,180.721 ; 7407_2.9@313.107,182.287 311.531,180.721 ; 311.531,180.721 7407_2.9@312.674,182.626 312.674,181.864 311.531,180.721
Net7407_3_1: 7407_3.1 LLC_SolenoidValve2.P$7 | length 33.1
  Top Layer w0.5: LLC_SolenoidValve2.P$7@291.119,228.669 293.613,229.605 ; LLC_SolenoidValve2.P$7@291.637,227.818 293.613,229.605 ; 7407_3.1@299.781,236.055 297.561,236.601 ; 7407_3.1@299.781,237.147 297.561,236.601 ; LLC_SolenoidValve2.P$7@291.338,228.219 292.227,228.219 ; LLC_SolenoidValve2.P$7@291.338,228.219 293.613,229.605 ; LLC_SolenoidValve2.P$7@291.338,228.219 292.227,228.219 ; 292.227,228.219 291.479,227.739 292.227,228.219 ; 292.227,228.219 291.479,228.699 292.227,228.219 ; 292.227,228.219 295.783,231.775 295.783,234.823 297.561,236.601 ; 297.561,236.601 7407_3.1@299.847,236.601 297.561,236.601
Net7407_3_2: 7407_3.2 DSwitch2.3 | length 23.8
  Top Layer w0.5: 7407_3.2@301.841,236.535 302.387,234.315 ; 7407_3.2@302.387,236.601 302.387,234.315 ; 7407_3.2@302.933,236.535 302.387,234.315 ; DSwitch2.3@311.583,230.075 312.127,231.941 ; DSwitch2.3@312.127,229.577 DSwitch2.3@312.127,229.997 312.127,231.941 ; DSwitch2.3@312.672,230.075 312.127,231.941 ; 302.387,234.315 303.282,233.42 310.648,233.42 312.127,231.941
Net7407_3_3: 7407_3.3 LLC_SolenoidValve2.P$8 | length 34.4
  Top Layer w0.5: LLC_SolenoidValve2.P$8@291.124,231.211 293.553,232.085 ; LLC_SolenoidValve2.P$8@291.635,230.357 293.553,232.085 ; 7407_3.3@304.393,236.733 304.927,237.744 ; 7407_3.3@304.927,236.601 304.927,237.744 ; 7407_3.3@305.461,236.733 304.927,237.744 ; LLC_SolenoidValve2.P$8@291.338,230.759 292.227,230.759 ; LLC_SolenoidValve2.P$8@291.338,230.759 293.553,232.085 ; LLC_SolenoidValve2.P$8@291.338,230.759 292.227,230.759 ; 292.227,230.759 291.479,230.279 292.227,230.759 ; 292.227,230.759 291.479,231.239 292.227,230.759 ; 292.227,230.759 294.132,232.664 294.132,235.712 296.799,238.379 304.292,238.379 304.927,237.744
Net7407_3_4: 7407_3.4 DSwitch2.6 | length 25
  Bottom Layer w0.5: DSwitch2.6@303.961,230.063 304.507,232.297 DSwitch2.6@305.053,230.063 ; DSwitch2.6@304.507,229.997 304.507,232.752 307.467,235.712 ; 7407_3.4@306.971,236.839 306.06,234.305 ; 7407_3.4@307.904,236.267 306.06,234.305 ; 306.06,234.305 7407_3.4@307.467,236.601 ; 307.467,235.712 7407_3.4@307.467,236.601 ; 307.467,235.712 306.944,236.431 307.467,235.712 ; 307.467,235.712 307.99,236.431 307.467,235.712 ; 307.467,235.712 7407_3.4@307.467,236.601
Net7407_3_5: 7407_3.5 LLC_SolenoidValve2.P$11 | length 28.9
  Top Layer w0.5: LLC_SolenoidValve2.P$11@291.338,238.379 293.751,238.379 295.021,239.649 308.483,239.649 310.007,238.125 ; LLC_SolenoidValve2.P$11@291.394,237.882 293.588,238.379 LLC_SolenoidValve2.P$11@291.394,238.876 ; 7407_3.5@309.466,236.7 310.007,238.125 ; 7407_3.5@310.007,236.601 310.007,238.125 ; 7407_3.5@310.548,236.7 310.007,238.125
Net7407_3_6: 7407_3.6 DSwitch2.11 | length 61.2
  Top Layer w0.5: DSwitch2.11@304.087,222.732 305.435,223.901 ; DSwitch2.11@305.015,222.167 305.435,223.901 ; v3@310.783,223.552 308.712,223.901 v3@310.783,224.25 ; v3(310.812,223.901) 305.435,223.901 ; 7407_3.6@312.005,236.693 312.547,238.252 ; 7407_3.6@312.547,236.601 312.547,238.252 ; 7407_3.6@313.089,236.693 312.547,238.252 ; v1@317.344,238.792 315.273,239.141 ; v1@317.344,239.49 315.273,239.141 ; 305.435,223.901 DSwitch2.11@304.507,222.377 304.507,222.973 305.435,223.901 ; 312.547,238.252 313.436,239.141 v1(317.373,239.141) 315.273,239.141
  Bottom Layer w0.5: v3(310.812,223.901) 312.166,223.901 ; v3@310.857,223.554 312.166,223.901 ; v3@310.857,224.248 312.166,223.901 ; v1(317.373,239.141) 318.262,239.141 ; v1@317.442,238.798 318.262,239.141 ; v1@317.442,239.484 318.262,239.141 ; 312.166,223.901 313.563,225.298 318.135,225.298 319.151,226.314 319.151,238.252 318.262,239.141
Net7407_3_8: 7407_3.8 DSwitch2.15 | length 58.2
  Top Layer w0.5: DSwitch2.15@314.134,222.514 314.667,223.481 ; DSwitch2.15@314.667,222.377 314.667,223.481 ; 7407_3.8@315.087,244.221 320.167,244.221 ; 7407_3.8@315.153,243.675 317.387,244.221 7407_3.8@315.153,244.767 ; DSwitch2.15@315.2,222.514 314.667,223.481 ; v3@321.389,225.855 320.675,224.282 ; v1@321.424,242.47 320.167,244.221 ; v1(321.691,242.697) 320.167,244.221 ; v1@321.918,242.964 320.167,244.221 ; v3@321.952,225.446 320.675,224.282 ; 314.667,223.481 315.468,224.282 320.675,224.282 ; 320.675,224.282 v3(321.691,225.679) 321.691,225.298 320.675,224.282
  Bottom Layer w0.5: v3@321.342,225.708 321.691,227.779 v3@322.04,225.708 ; v1@321.342,242.668 321.691,240.597 v1@322.04,242.668 ; v3(321.691,225.679) v1(321.691,242.697)
Net7407_3_9: 7407_3.9 LLC_SolenoidValve2.P$12 | length 31.7
  Top Layer w0.5: LLC_SolenoidValve2.P$12@291.338,240.919 311.023,240.919 312.547,242.443 ; LLC_SolenoidValve2.P$12@291.394,240.422 293.588,240.919 LLC_SolenoidValve2.P$12@291.394,241.416 ; 7407_3.9@312.004,244.136 312.547,242.443 ; 7407_3.9@312.547,244.221 312.547,242.443 ; 7407_3.9@313.09,244.136 312.547,242.443
Net7407_4_1: 7407_4.1 LLC_SolenoidValve3.P$7 | length 27
  Top Layer w0.5: LLC_SolenoidValve3.P$7@291.338,196.723 293.751,196.723 296.291,199.263 296.291,204.978 297.053,205.74 7407_4.1@299.847,205.74 297.547,205.74 ; LLC_SolenoidValve3.P$7@291.394,196.226 293.588,196.723 LLC_SolenoidValve3.P$7@291.394,197.22 ; 7407_4.1@299.781,205.194 297.547,205.74 ; 7407_4.1@299.781,206.286 297.547,205.74
Net7407_4_2: 7407_4.2 DSwitch3.3 | length 40.9
  Top Layer w0.5: 7407_4.2@301.841,205.672 302.387,203.518 ; 7407_4.2@302.387,205.74 302.387,203.518 ; 7407_4.2@302.933,205.672 302.387,203.518 ; v3@303.387,202.88 302.387,203.518 ; v3@303.573,203.547 302.387,203.518 ; v3(307.975,203.2) 310.896,203.2 312.127,201.969 ; v3@308.004,202.851 310.075,203.2 v3@308.004,203.549 ; DSwitch3.3@311.592,200.915 312.127,201.969 ; DSwitch3.3@312.127,200.787 312.127,201.969 ; DSwitch3.3@312.662,200.915 312.127,201.969 ; 302.387,203.518 v3(303.53,203.2) ; 302.387,203.518 302.705,203.2 ; 302.705,203.2 v3(303.53,203.2) ; 302.705,203.2 303.456,203.542 302.705,203.2 ; 302.705,203.2 303.456,202.858 302.705,203.2 ; 302.705,203.2 v3(303.53,203.2)
  Bottom Layer w0.5: v3(303.53,203.2) v3(307.975,203.2) ; v3@303.559,202.851 305.63,203.2 v3@303.559,203.549 ; v3@307.946,202.851 305.875,203.2 v3@307.946,203.549
Net7407_4_3: 7407_4.3 LLC_SolenoidValve3.P$8 | length 27.5
  Top Layer w0.5: LLC_SolenoidValve3.P$8@291.338,199.263 293.37,199.263 ; LLC_SolenoidValve3.P$8@291.4,198.767 293.37,199.263 ; LLC_SolenoidValve3.P$8@291.4,199.759 293.37,199.263 ; 7407_4.3@304.393,205.872 304.927,206.883 ; 7407_4.3@304.927,205.74 304.927,206.883 ; 7407_4.3@305.461,205.872 304.927,206.883 ; 293.37,199.263 294.767,200.66 294.767,205.232 297.18,207.645 304.165,207.645 304.927,206.883
Net7407_4_4: 7407_4.4 DSwitch3.6 | length 16.9
  Top Layer w0.5: DSwitch3.6@303.969,200.903 304.507,202.096 ; DSwitch3.6@304.507,200.787 304.507,202.096 ; DSwitch3.6@305.045,200.903 304.507,202.096 ; 7407_4.4@306.985,206.005 305.94,203.529 ; 7407_4.4@307.885,205.383 305.94,203.529 ; 304.507,202.096 307.467,205.056 7407_4.4@307.467,205.74 305.94,203.529
Net7407_4_5: 7407_4.5 LLC_SolenoidValve3.P$11 | length 23.1
  Top Layer w0.5: LLC_SolenoidValve3.P$11@291.338,206.883 LLC_SolenoidValve3.P$11@291.611,207.156 ; 292.735,206.883 294.386,208.534 308.61,208.534 310.007,207.137 ; 7407_4.5@309.468,205.848 310.007,207.137 ; 7407_4.5@310.007,205.74 310.007,207.137 ; 7407_4.5@310.546,205.848 310.007,207.137